# Altium PCB door_lock_controller.PcbDoc
Units mil, origin at the board's own origin, x right, y up, seen from the top; angles counter-clockwise.
Board outline 6000 x 4000 mil, 2 copper layers (Top Layer, Bottom Layer); 24 components, 22 nets, 107 pads, 11 vias.
Unrouted connection lines stored in the file: 1.
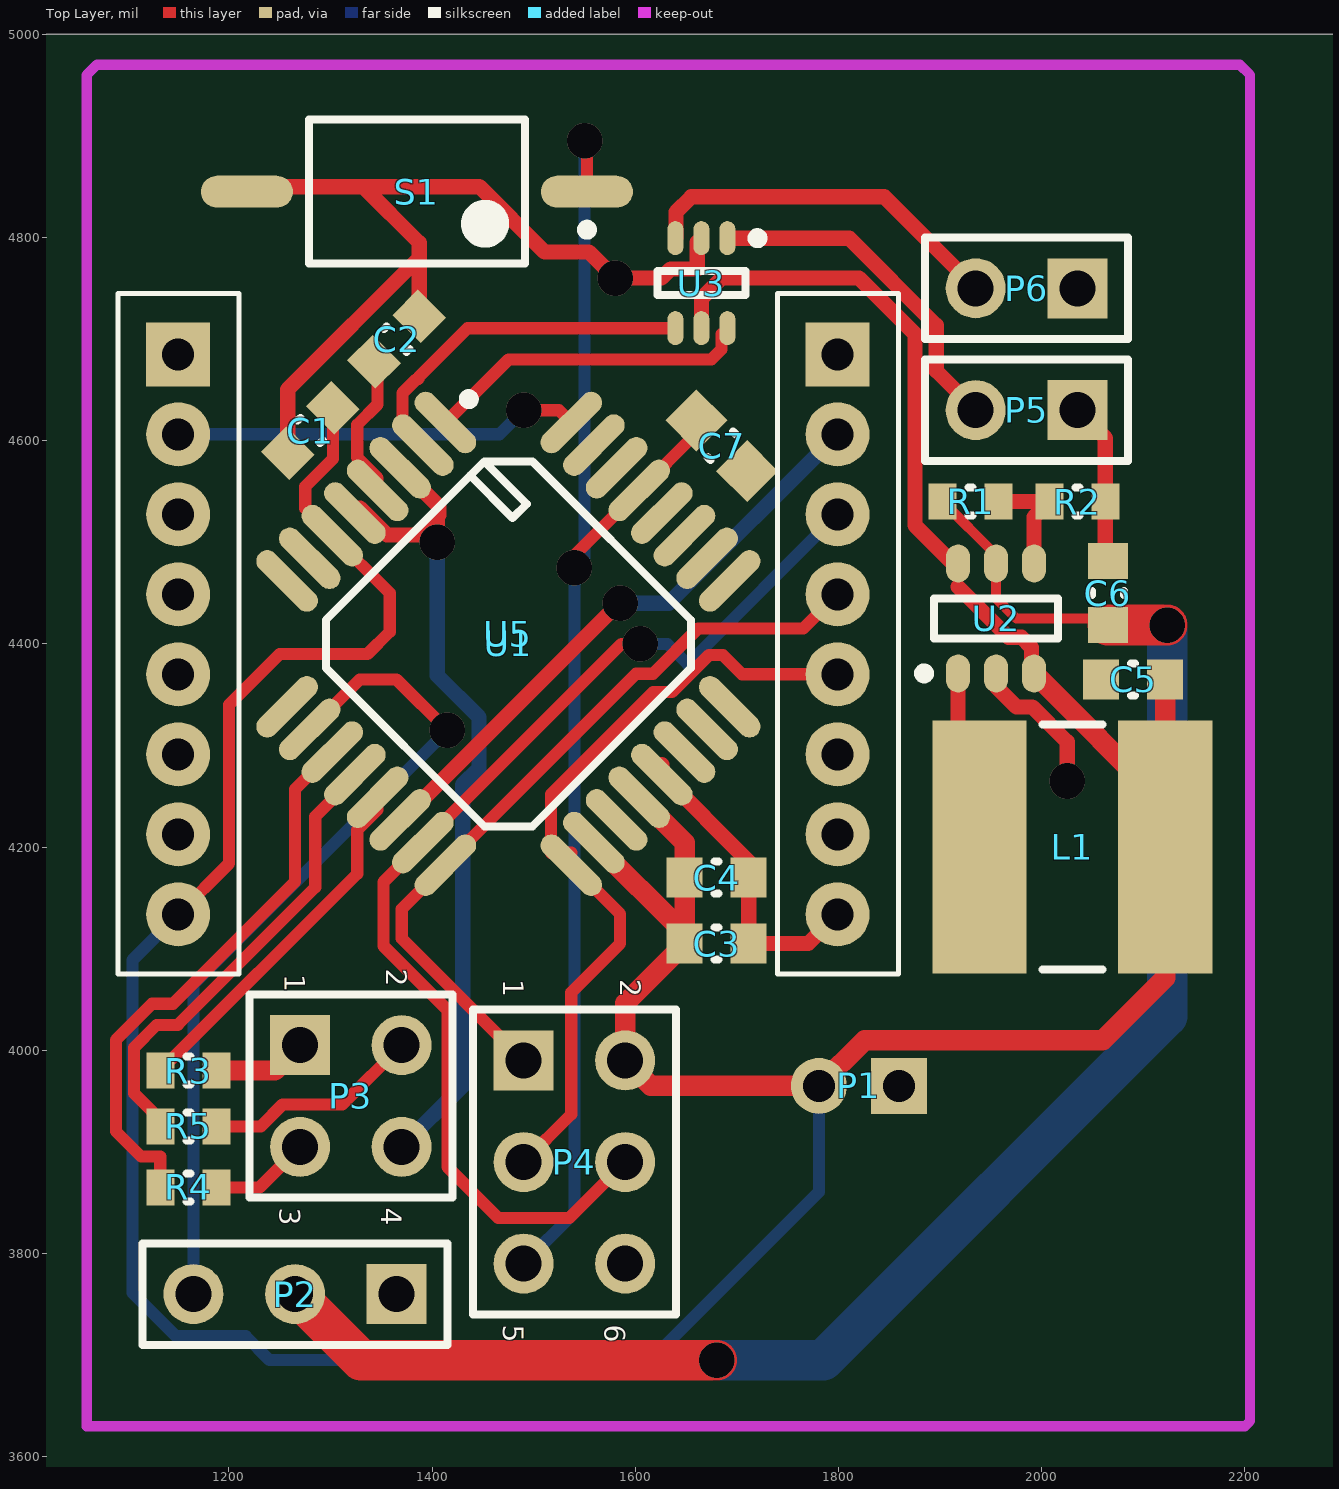
[diagram p0: Top Layer view]
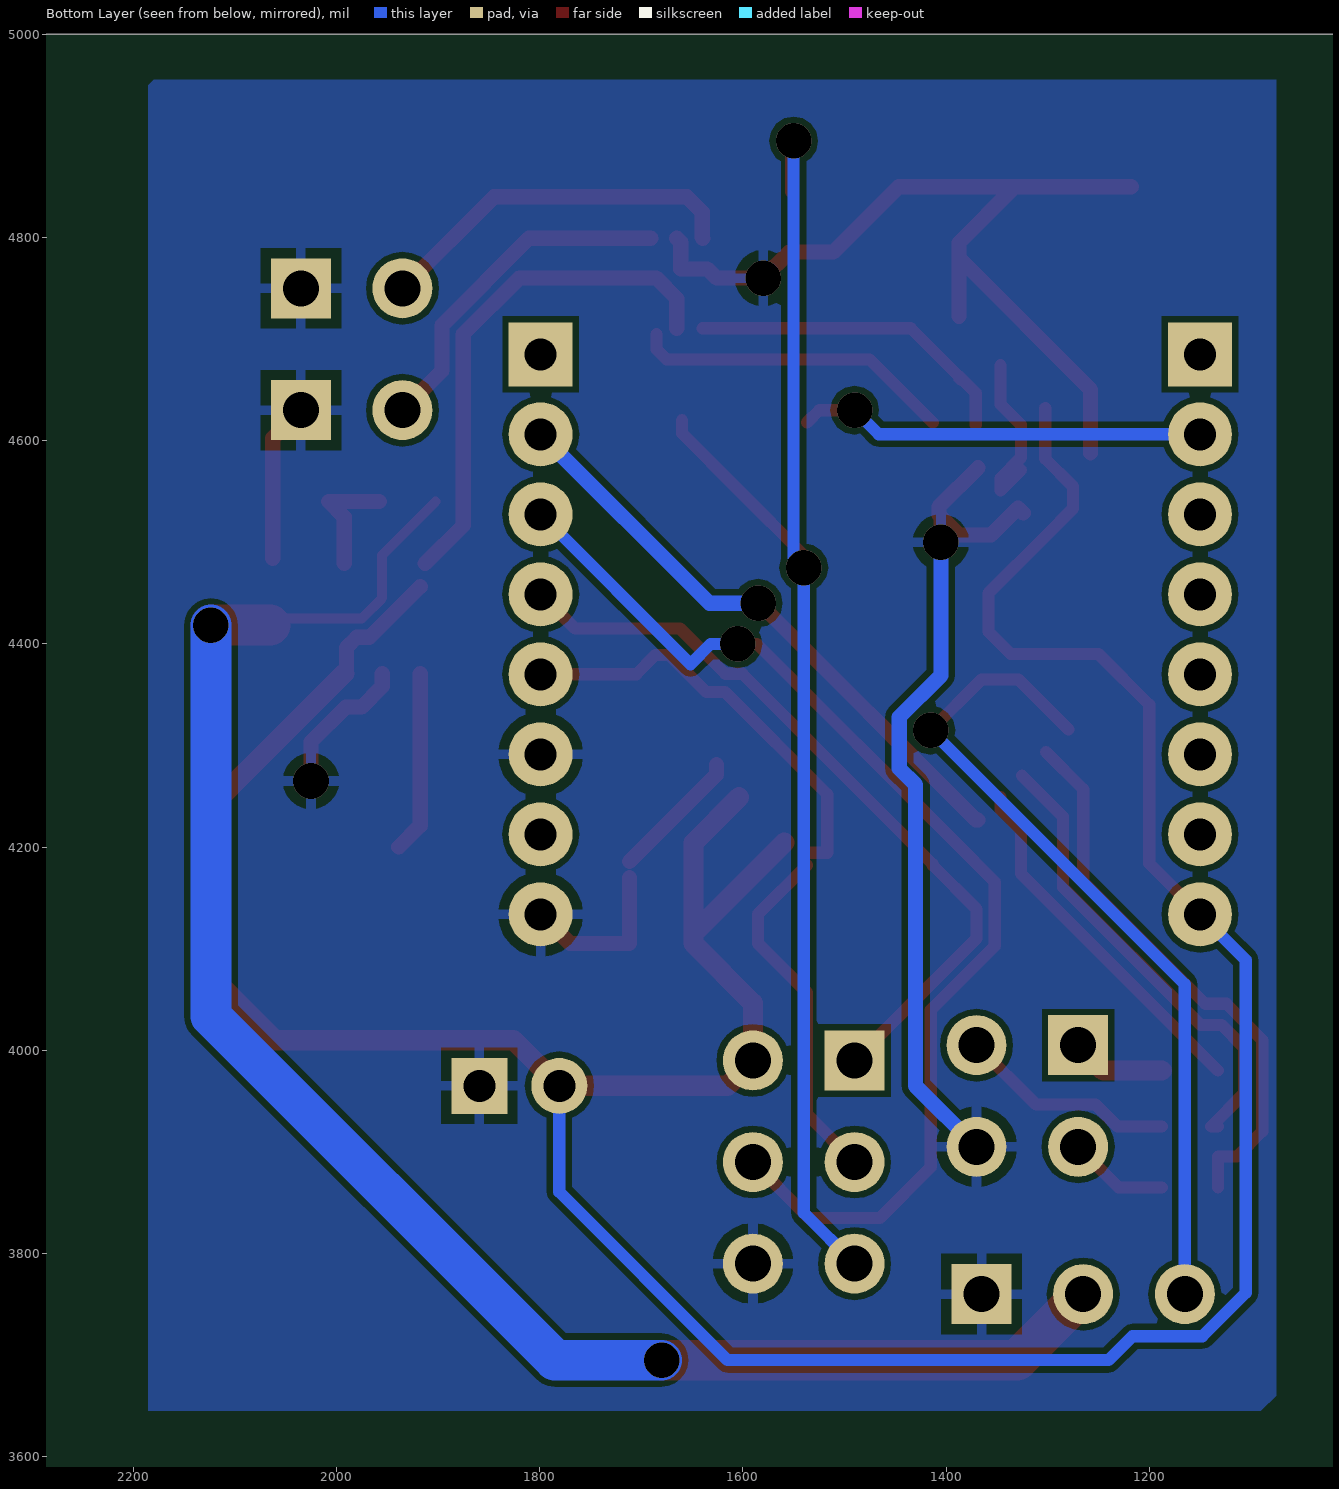
[diagram p1: Bottom Layer view, seen from below]

## Layer stack, top to bottom
Top Solder: solder mask 0.4, Solder Resist, Dk 3.5
Top Layer: signal copper 1.4
Dielectric 1: dielectric 12.6, FR-4, Dk 4.8
Bottom Layer: signal copper 1.4
Bottom Solder: solder mask 0.4, Solder Resist, Dk 3.5

## Board outline
1000,1000 7000,1000 7000,5000 1000,5000

## Design rules (kind name [scope] priority, off if disabled: settings)
Clearance [All] p1: gap=6
PolygonConnect [All] p1: connectstyle=Relief reliefconductorwidth=10 reliefentries=4 polygonreliefangle="90 Angle" airgapwidth=10
RoutingVias [All] p1: holewidth=15 width=35 viastyle="Through Hole" minholewidth=15 minwidth=35 maxholewidth=80 maxwidth=100
SolderMaskExpansion [All] p1: expansion=4
UnpouredPolygon [All] p1: allowunpoured=FALSE
Width [All] p1: maxlimit=40 minlimit=10 preferedwidth=10
29 further rules are at their usual default settings.

## Components (designator, comment, footprint, x,y, rotation, side; value= is the part's Value field where it differs from the comment)
C1 "CAP 100nF 10V 0603(1608)" CAPC0603(1608)100_N 1280,4610 r45 top
C2 "CAP 100nF 10V 0603(1608)" CAPC0603(1608)100_N 1365,4700 r225 top
C3 "CAP 100nF 10V 0603(1608)" CAPC0603(1608)100_N 1680,4105 r180 top
C4 "CAP 100nF 10V 0603(1608)" CAPC0603(1608)100_N 1680,4170 r180 top
C5 "CAP 10uF 10V 0603(1608)" CAPC0603(1608)100_N 2090,4365 r0 top
C6 "CAP 10uF 10V 0603(1608)" CAPC0603(1608)100_N 2065,4450 r270 top
C7 "CAP 10nF 10V 0603(1608)" CAPC0603(1608)100_M 1685,4595 r135 top
L1 "TYS6045_inductor" TYS6045 2030,4200 r180 top
P1 "Hirose2" DF3A-2P-2DS 1820,3965 r180 top
P2 "Header 3" HDR1X3 1365,3760 r180 top
P3 "Header 2X2" HDR2X2 1270,4005 r270 top
P4 "Header 3X2" HDR2X3 1490,3990 r270 top
P5 "Header 2" HDR1X2 2035,4630 r180 top
P6 "Header 2" HDR1X2 2035,4750 r180 top
R1 "1M8 5% 0603(1608)" RESC0603(1608)_L 1930,4540 r180 top
R2 "180K 5% 0603(1608)" RESC0603(1608)_L 2035,4540 r180 top
R3 "180R 5% 0603(1608)" RESC0603(1608)_L 1160,3980 r0 top
R4 "180R 5% 0603(1608)" RESC0603(1608)_L 1160,3865 r0 top
R5 "180R 5% 0603(1608)" RESC0603(1608)_L 1160,3925 r180 top
S1 "2lead_low_profile_switch" 2lead_low_profile_switch 1385,4845 r180 top
U1 "atmega88" atmega44/88/168 1475,4400 r315 top
U2 "tlv61220_boost" TLV61220_BOOST 1955,4425 r90 top
U3 "NC7WZ14" NC7WZ14 1665,4755 r270 top
U5 "RFM69" RFM69 1150,4410 r0 top

## Footprints (in the part's own frame and the unit in brackets; to place one, negate y for a bottom-side part, rotate by r counter-clockwise, add the part's x,y. Pads: shape width x height; smd on the part's side, far side on the other; paste and mask are expansions set on the pad)
2lead_low_profile_switch [mm] "CFP, 2-Leads, Body 3.60x6.00mm (max), Pitch 0.00mm, IPC Medium Density"
  oval 2.3x0.8 smd: 1(-4.25,0) 2(4.25,0)
  silkscreen extent -4.38,-1.8 2.7,1.8, body extent -3,-1.8 3,1.8, height 2.5
atmega44/88/168 [mm] "CQFP, 32-Leads, Body 11.15x11.15mm, Pitch 0.80mm, IPC Medium Density"
  oval 1.95x0.55 smd: 1(-5.025,2.8) 2(-5.025,2) 3(-5.025,1.2) 4(-5.025,0.4) 5(-5.025,-0.4) 6(-5.025,-1.2) 7(-5.025,-2) 8(-5.025,-2.8) 17(5.025,-2.8) 18(5.025,-2) 19(5.025,-1.2) 20(5.025,-0.4) 21(5.025,0.4) 22(5.025,1.2) 23(5.025,2) 24(5.025,2.8)
  oval 0.55x1.95 smd: 9(-2.8,-5.025) 10(-2,-5.025) 11(-1.2,-5.025) 12(-0.4,-5.025) 13(0.4,-5.025) 14(1.2,-5.025) 15(2,-5.025) 16(2.8,-5.025) 25(2.8,5.025) 26(2,5.025) 27(1.2,5.025) 28(0.4,5.025) 29(-0.4,5.025) 30(-1.2,5.025) 31(-2,5.025) 32(-2.8,5.025)
  silkscreen extent -5.15,-3.65 3.65,3.75, body extent -3.5,-3.5 3.5,3.5, height 1.2
CAPC0603(1608)100_M [mm] "Chip Capacitor, Body 1.6x0.8mm, Height 1.0mm, IPC Low Density"
  rect 1.1x1.1 smd: 1(-0.9,0) 2(0.9,0)
  silkscreen extent -0.05,-0.45 0.05,0.45, body extent -0.88,-0.47 0.88,0.47, height 1
CAPC0603(1608)100_N [mm] "Chip Capacitor, Body 1.6x0.8mm, Height 1.0mm, IPC Medium Density"
  rect 0.9x1 smd: 1(-0.8,0) 2(0.8,0)
  silkscreen extent -0.05,-0.4 0.05,0.4, body extent -0.88,-0.47 0.88,0.47, height 1
DF3A-2P-2DS [mm] "Two terminal, Right Angle Connector"
  rect 1.4x1.4 hole 0.8: 1(-1,0)
  round 1.4 hole 0.8: 2(1,0)
  body extent -3.05,-1.5 3.05,5.7, height 5
HDR1X2 [mm] "Connector; Header; 2 Position"
  rect 1.5x1.5 hole 0.9: 1(0,0)
  round 1.5 hole 0.9: 2(2.54,0)
  silkscreen extent -1.27,-1.27 3.81,1.27
HDR1X3 [mm] "Connector; Header; 3 Position"
  rect 1.5x1.5 hole 0.9: 1(0,0)
  round 1.5 hole 0.9: 2(2.54,0) 3(5.08,0)
  silkscreen extent -1.27,-1.27 6.35,1.27
HDR2X2 [mm] "Connector; Header; 2x2 Position"
  rect 1.5x1.5 hole 0.9: 1(0,0)
  round 1.5 hole 0.9: 2(0,2.54) 3(2.54,0) 4(2.54,2.54)
  silkscreen extent -1.27,-1.27 3.81,3.81
HDR2X3 [mm] "Connector; Header; 3x2 Position"
  rect 1.5x1.5 hole 0.9: 1(0,0)
  round 1.5 hole 0.9: 2(0,2.54) 3(2.54,0) 4(2.54,2.54) 5(5.08,0) 6(5.08,2.54)
  silkscreen extent -1.27,-1.27 6.35,3.81
NC7WZ14 [mm] "TinyLogic Dual Inverter with Schmitt trigger inputs, IPC Compliant"
  oval 0.85x0.4 smd: 1(-1.125,0.65) 2(-1.125,0) 3(-1.125,-0.65) 4(1.125,-0.65) 5(1.125,0) 6(1.125,0.65)
  silkscreen extent -1.25,-1.1 0.3,1.53, body extent -0.7,-1.1 0.7,1.1, height 1
RESC0603(1608)_L [mm] "Chip Resistor, Body 1.6x0.8mm, IPC High Density"
  rect 0.7x0.9 smd: 1(-0.7,0) 2(0.7,0)
  silkscreen extent -0.05,-0.35 0.05,0.35, body extent -0.85,-0.47 0.85,0.47, height 0.6
RFM69 [mm]
  rect 1.6x1.6 hole 0.8: 1(0,6.985) 16(16.485,6.985)
  round 1.6 hole 0.8: 2(0,4.985) 3(0,2.985) 4(0,0.985) 5(0,-1.015) 6(0,-3.015) 7(0,-5.015) 8(0,-7.015) 9(16.485,-7.015) 10(16.485,-5.015) 11(16.485,-3.015) 12(16.485,-1.015) 13(16.485,0.985) 14(16.485,2.985) 15(16.485,4.985)
  silkscreen extent -1.5,-8.51 18.01,8.51, body extent -1.68,-8.76 18.16,8.71, height 9.8
TLV61220_BOOST [mm] "TSOP, 6-Leads, Body 2.90x1.60mm, Pitch 0.95mm, IPC Medium Density"
  oval 0.95x0.6 smd: 1(-1.375,0.95) 2(-1.375,0) 3(-1.375,-0.95) 4(1.375,-0.95) 5(1.375,0) 6(1.375,0.95)
  silkscreen extent -1.5,-1.55 0.5,1.92, body extent -0.9,-1.55 0.9,1.55, height 1.45
TYS6045 [mm] "Chip Inductor, 2-Leads, Body 6.00x6.00mm, IPC Medium Density"
  rect 2.36x6.32 smd: 1(-2.32,0) 2(2.32,0)
  silkscreen extent -0.75,-3.06 0.75,3.06, body extent -3.15,-3.15 3.15,3.15, height 4.5

## Part data
C1 C2 C3 C4: library part CMP-1035-02581-1, "CAP 100nF 10V ±20% 0603 (1608 Metric) Thickness 1mm SMD"
C5 C6: library part CMP-1035-02799-1, "CAP 10uF 10V ±10% 0603 (1608 Metric) Thickness 1mm SMD"
C7: library part CMP-1035-02304-1, "CAP 10nF 10V ±2% 0603 (1608 Metric) Thickness 1mm SMD"
P2: "Header, 3-Pin"
P3: "Header, 2-Pin, Dual row"
P4: "Header, 3-Pin, Dual row"
P5 P6: "Header, 2-Pin"
R1: library part CMP-1012-00152-1, "1M8 0.1W 5% 0603 (1608 Metric)  SMD"
R2: library part CMP-1012-00128-1, "180K 0.1W 5% 0603 (1608 Metric)  SMD"
R3 R4 R5: library part CMP-1012-00056-1, "180R 0.1W 5% 0603 (1608 Metric)  SMD"

## Via types
v1: diameter 35, hole 35, Top Layer to Bottom Layer, 11 vias

## Nets (pads, with @x,y where several pads share a name; then routed paths per layer and width w, separated by ;. In a path a pad name is that pad's centre, name@x,y a point inside that pad or via, vN(x,y) a via of type N, cw(c..) or ccw(c..) an arc to the next point about the centre after c; other vN are vias at no path point)
3.7V: C1.2 C2.2 C3.2 C4.2 C5.2 L1.1 P1.2 P4.2 U1.4 U1.6 U1.18 U1.20 U2.3 U2.6 U3.5 U5.8 | length 4242.1
  Top Layer w12: U5.8 1200,4183.82 1200,4340 1250,4390 1336.37,4390 1358.19,4411.81 1358.19,4450 U1.6 1275,4533.19 1275,4555 1302.27,4582.27 C1.2 ; U1.4@1326.2,4571.07 U1.4 1346.25,4563.29 1326.2,4583.33 1326.2,4615.61 1346.25,4635.65 C2.2@1346.25,4674.21
  Top Layer w15: U3.5 1665,4740 1685,4760 1820,4760 1875.16,4704.84 1875.16,4516.69 U2.6@1912.72,4479.13 ; 1917.6,4456.24 1967.34,4406.5 1980,4406.5 1990,4396.5 1990,4373.27 U2.3
  Top Layer w20: U1.18 C3.2@1648.5,4115.14 ; U1.20 1648.5,4204.23 C4.2 C3.2@1648.5,4115.14 ; U2.3 L1.1@2121.5,4241.77 ; C5.2 L1.1@2121.5,4241.77 ; C3.2@1648.5,4115.14 C3.2 1590,4046.5 P4.2 1615,3965 P1.2 1825.63,4010 2060,4010 2121.5,4071.5 L1.1@2121.5,4241.77
  Bottom Layer w12: U5.8 1105,4088.82 1105,3761.27 1147.8,3718.47 1216.53,3718.47 1240,3695 1615,3695 1780.63,3860.63 P1.2
5.5V: C6.2 P2.2 R1.2 U2.5 | length 1697.7
  Top Layer w10: R1.2 1955,4487.44 U2.5 1955,4445 1975,4425 C6.2@2058.5,4425
  Top Layer w40: P2.2 1330,3695 v1(1680,3695) ; C6.2 v1(2123.5,4418.5)
  Bottom Layer w40: v1(1680,3695) 1785,3695 2123.5,4033.5 v1(2123.5,4418.5)
BUTTON1: P5.2 U3.1 | length 340.7
  Top Layer w15: U3.1 1810.41,4799.29 1896.16,4713.54 1896.16,4668.84 P5.2
BUTTON2: P6.2 U3.3 | length 364.4
  Top Layer w15: U3.3 1640,4799.88 1640,4825 1655,4840 1845,4840 P6.2
BUTTON_OUT1: U1.1 U3.6 | length 316.8
  Top Layer w12: U1.1 1475,4679.78 1674.78,4679.78 1684.87,4689.87 U3.6@1684.87,4704.99
BUTTON_OUT2: U1.2 U3.4 | length 327.1
  Top Layer w12: U1.2@1370.74,4615.61 1370.74,4646.78 1384.12,4660.15 1385.42,4660.15 1386.92,4661.66 1386.92,4662.96 1434.67,4710.71 U3.4
GND: C1.1 C2.1 C3.1 C4.1 C5.1 C6.1 C7.1 P1.1 P2.1 P3.4 P4.6 P5.1 P6.1 R2.1 S1.2 U1.3 U1.5 U1.21 U2.2 U3.2 U5.9 U5.11 | length 2344.7
  Top Layer w15: S1.2@1217.68,4850 1332.05,4850 ; C1.1 1257.73,4650.46 1387.27,4780 ; U1.5 1329.04,4533.82 1355.66,4507.21 1387.21,4507.21 1405,4525 ; U1.3 1406.81,4535 1406.81,4526.81 1405,4525 ; C2.1 1387.27,4780 ; v1(1405,4500) 1405,4525 ; U1.21@1626.03,4281.38 U1.21 C4.1@1711.5,4185.78 ; U3.2 1661,4795.29 1661,4769.06 1634.77,4769.06 1625.71,4760 v1(1580,4760) 1554.25,4785.75 1510.68,4785.75 1446.43,4850 1332.05,4850 ; C4.1 C3.1 1770.18,4105 U5.9 ; U2.2 1955,4357.91 1975,4337.91 1990.71,4337.91 2025,4303.62 v1(2025,4265) ; P5.1 2062.56,4602.44 R2.1 C6.1@2062.56,4483.94 ; 1332.05,4850 1387.27,4794.78 1387.27,4780
  Bottom Layer w15: P3.4 1430,3965 1430,4261.42 1446,4277.42 1446,4327.84 1405,4368.84 v1(1405,4500)
LED1: R3.1 U1.13 | length 357.5
  Top Layer w12: R3.1 1326.2,4173.76 1326.2,4216.67 1346.25,4236.71 U1.13
LED2: R4.1 U1.11 | length 557.9
  Top Layer w12: R4.1 1132.44,3895.28 1113.69,3895.28 1088.66,3920.31 1088.66,4010.14 1124.24,4045.72 1144.81,4045.72 1265,4165.91 1265,4256.81 U1.11
LED3: R5.2 U1.12 | length 467.6
  Top Layer w12: R5.2 1138.97,3925 1106.66,3957.31 1106.66,4002.69 1128.97,4025 1149.54,4025 1285,4160.46 1285,4230 U1.12@1325.11,4270.11
MISO: P4.1 U1.16 U5.13 | length 755.7
  Top Layer w12: U1.16 1370,4139.1 1370,4110 P4.1 ; U1.16@1413.06,4183.06 1600.5,4370.5 1617.22,4370.5 1661.72,4415 1765.22,4415 U5.13
MOSI: P4.4 U1.15 U5.14 | length 1138.7
  Top Layer w12: P4.4 1535,3835 1465,3835 1415,3885 1415,4039.54 1352,4102.54 1352,4165.64 U1.15 1586.36,4400 v1(1605,4400)
  Bottom Layer w12: v1(1605,4400) 1631.48,4400 1651.48,4380 U5.14
NetL1_2: L1.2 U2.1 | length 179.6
  Top Layer w15: U2.1 1917.6,4221.06 L1.2
NetP3_1: P3.1 R3.2 | length 92.8
  Top Layer w20: R3.2 1245,3980 P3.1
NetP3_2: P3.2 R5.1 | length 215.6
  Top Layer w12: R5.1 1231.27,3925 1252.8,3946.53 1311.53,3946.53 P3.2
NetP3_3: P3.3 R4.2 | length 99
  Top Layer w12: R4.2 1230,3865 P3.3
NetR1_1: R1.1 R2.2 U2.4 | length 117
  Top Layer w15: R1.1 R2.2 1992.4,4524.96 U2.4
RESET: C7.2 P4.5 S1.1 U1.29 | length 1370.2
  Top Layer w12: v1(1540,4475) 1540,4487.27 U1.29 1659.94,4607.22 C7.2 ; v1(1550,4895) 1552.32,4897.32 S1.1
  Bottom Layer w12: P4.5 1540,3840 v1@1540,4465 ; v1(1540,4475) 1550,4485 v1(1550,4895)
RFM_INTERRUPT: U1.32 U5.2 | length 401.8
  Top Layer w12: v1(1490,4630) 1524.78,4630 U1.32
  Bottom Layer w12: U5.2 1466.26,4606.26 v1(1490,4630)
SCK: P4.3 U1.17 U5.12 | length 775.6
  Top Layer w12: P4.3 1536.94,3936.94 1536.94,4056.94 1585,4105 1585,4134.1 U1.17 ; U1.17@1536.94,4194.42 1516.9,4194.42 1516.9,4251.9 1617.5,4352.5 1636.02,4352.5 1672.44,4388.91 1686.09,4388.91 1704.96,4370.04 U5.12
SERVO1: P2.3 U1.10 | length 835.2
  Top Layer w12: U1.10 1328.64,4365 1365,4365 v1(1415,4315)
  Bottom Layer w12: P2.3 1165,4065 v1(1415,4315)
SS: U1.14 U5.15 | length 587.7
  Top Layer w15: U1.14 1370.54,4226.7 1583.84,4440 v1(1585,4440)
  Bottom Layer w15: v1(1585,4440) 1632.74,4440 U5.15
pads on no net: U1.7 U1.8 U1.9 U1.19 U1.22 U1.23 U1.24 U1.25 U1.26 U1.27 U1.28 U1.30 U1.31 U5.1 U5.3 U5.4 U5.5 U5.6 U5.7 U5.10 U5.16

## Polygon pours and split planes (outlines as drawn)
GND on Bottom Layer "Bottom Layer-GND" (solid, remove dead copper, pour order 2): 1075,3660 1090,3645 2185,3645 2185,4950 2180,4955 1075,4955

## Keep-outs
Top Layer:
  lines w10: 1060,4960 1070,4970 ; 1060,4960 1060,3630 2200,3630 2205,3635 2205,4960 2195,4970 1070,4970 ; 1060,4960 1070,4970

## Text inside footprints (layer, text, board x,y; h text height)
P3: Top Overlay "1" at 1255,4075 h20 r270; Top Overlay "2" at 1355,4080 h20 r270; Top Overlay "4" at 1350,3845 h20 r270; Top Overlay "3" at 1250,3845 h20 r270
P4: Top Overlay "6" at 1570,3730 h20 r270; Top Overlay "5" at 1470,3730 h20 r270; Top Overlay "2" at 1585,4070 h20 r270; Top Overlay "1" at 1470,4070 h20 r270